# EAGLE board Qwiic-USB_Hub-Panel (EAGLE 9.6.2), part 1 of 2
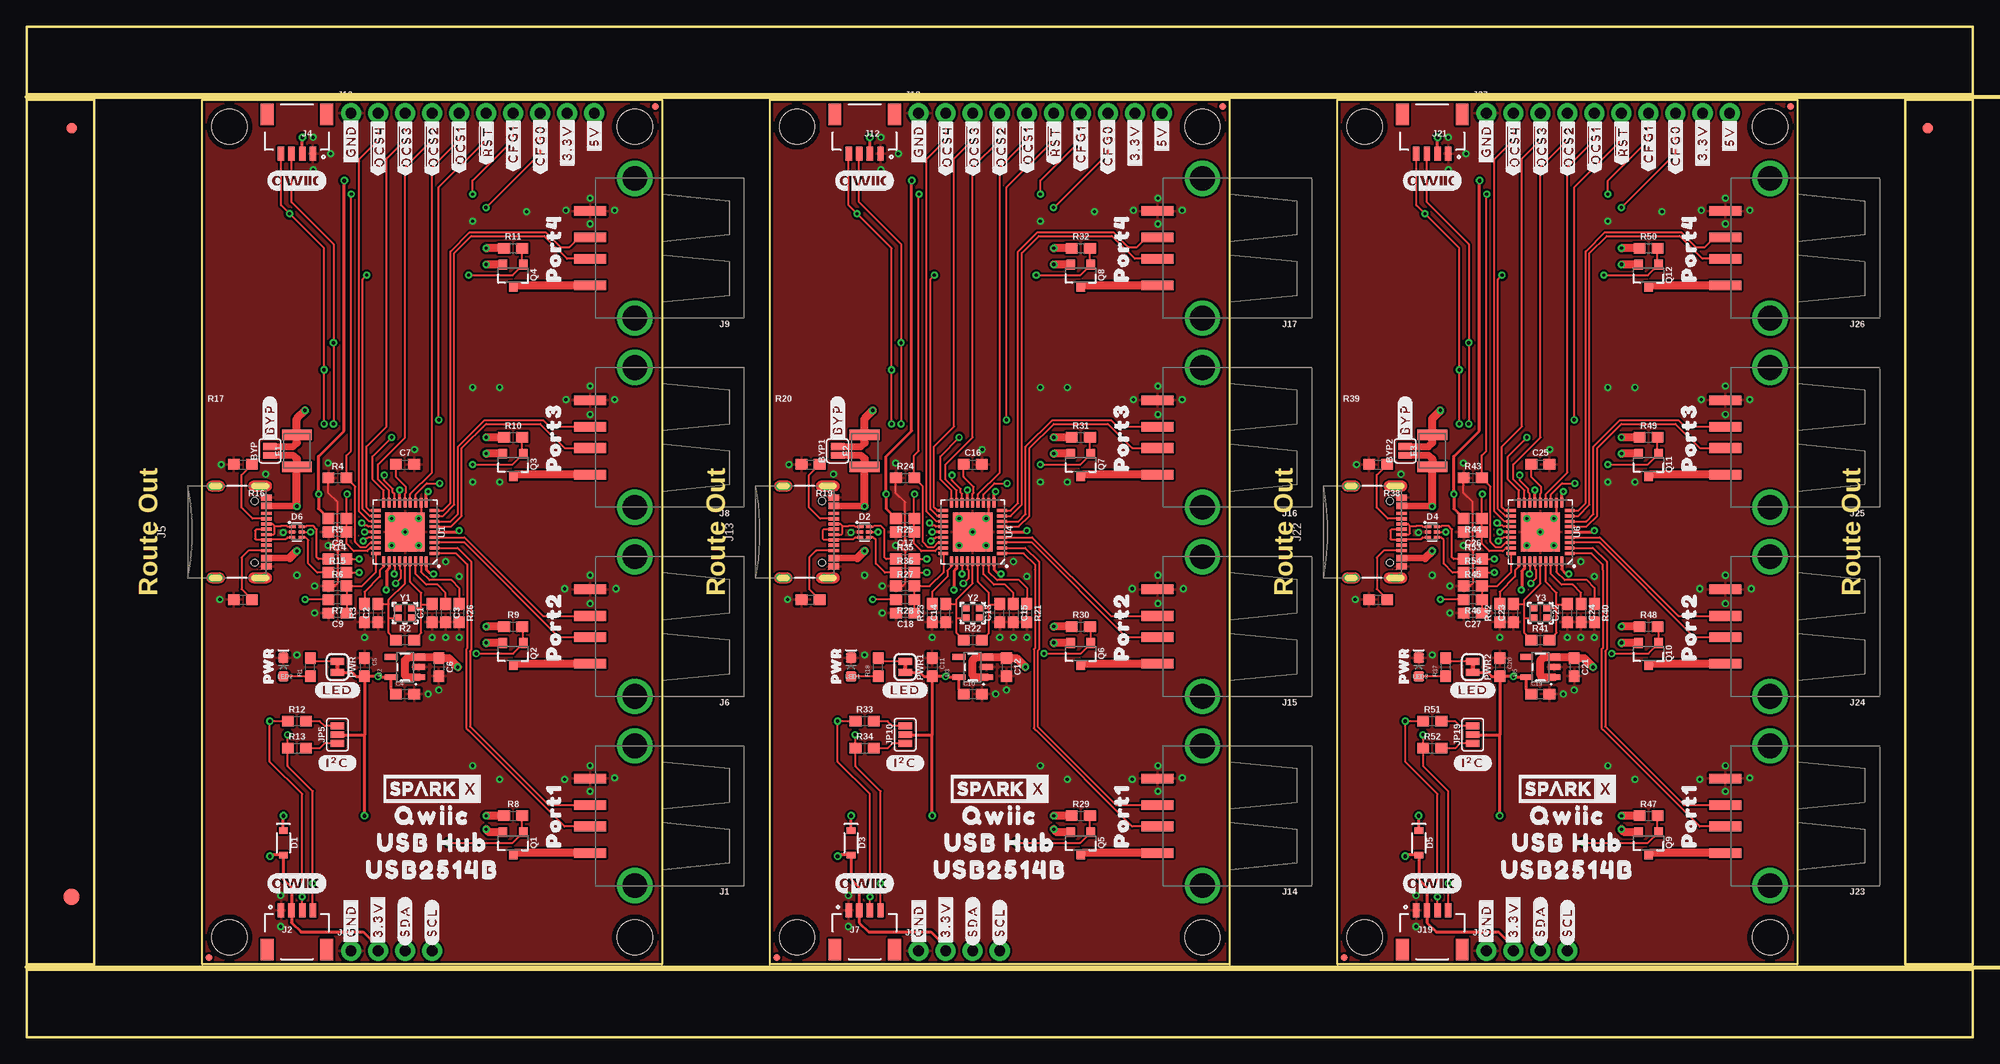
[diagram p0: board, top side]
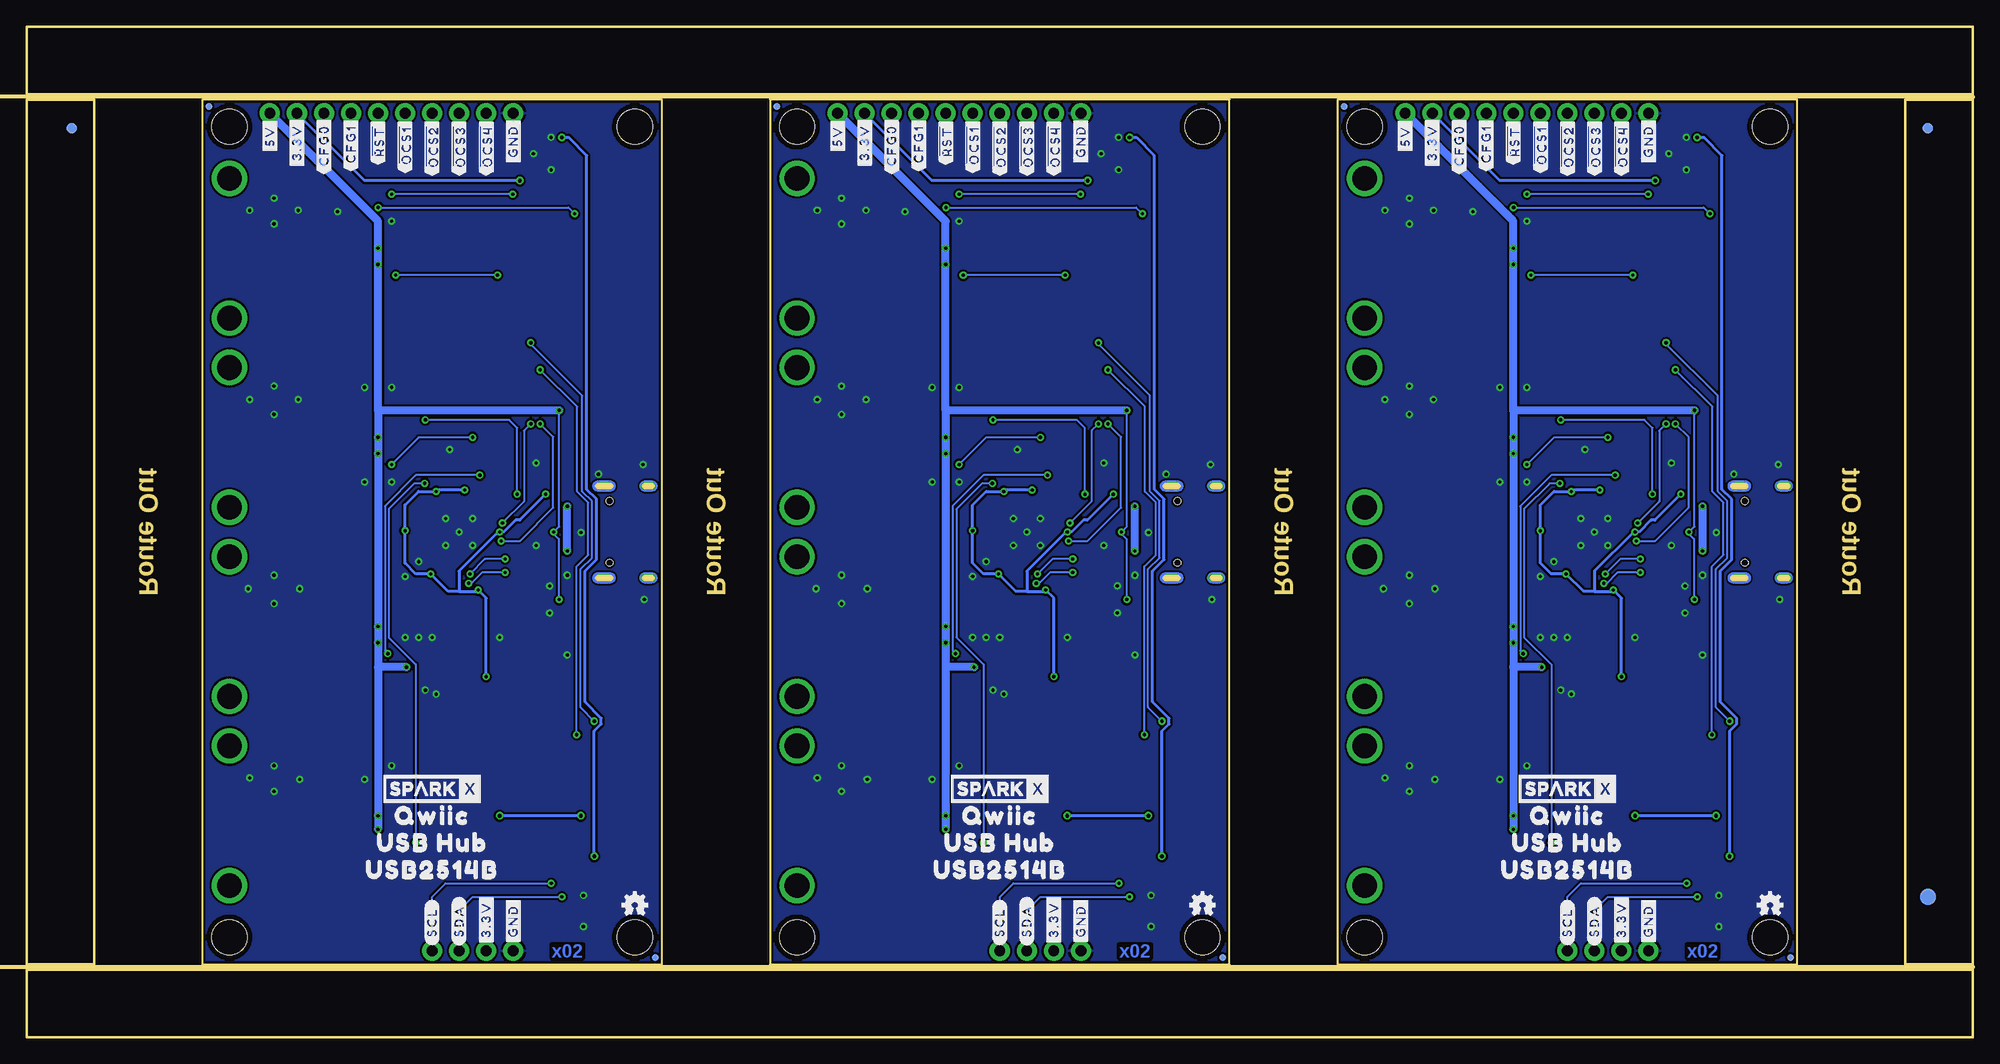
[diagram p1: board, bottom side, seen from below]

Size 182.88 x 95 mm. Coordinates in mm from the lower left corner, seen from the top.
Outline: 59.69,6.86 16.51,6.86 16.51,88.14 59.69,88.14 59.69,6.86
Outline: 113.03,6.86 69.85,6.86 69.85,88.14 113.03,88.14 113.03,6.86
Outline: 166.37,6.86 123.19,6.86 123.19,88.14 166.37,88.14 166.37,6.86
Outline: 0,6.35 182.88,6.35 182.88,0 0,0 0,6.35
Outline: 176.53,88.14 182.88,88.14 182.88,6.86 176.53,6.86 176.53,88.14
Outline: 0,95 182.88,95 182.88,88.65 0,88.65 0,95
Outline: 0,88.14 6.35,88.14 6.35,6.86 0,6.86 0,88.14
Copper layers (1*16): Top 0.035mm / dielectric 1.5mm / Bottom 0.035mm
Design rules "Qwiic-USB_Hub": minimum track width 7mil, minimum drill 0.3mm, track to track 7mil, track to pad 7mil, pad to pad 7mil, via to via 7mil, smd to smd 7mil, copper to edge 7mil, drill to drill 7mil, minimum pad ring 7mil, minimum via ring 7mil, stop-mask expansion 4mil, vias tented up to drill 25mil, thermal gap 10mil
Net classes: 2 3.3V: width 0.305 mm
Milling: 2 lines

## Footprints (pad centres in the part's own frame; a part is rotated, then mirrored left to right if it is on the bottom)
SMT-JUMPER_2_NO_SILK = smd 0.635 x 1.27: 1 -0.406,0; 2 0.406,0
0603 = smd 1.1 x 1: 1 -0.85,0; 2 0.85,0
SOD-323 = smd 0.63 x 0.83: A 1.15,0; C -1.15,0
SOT886 = smd 0.61 x 0.25: 1 -0.405,0.5 | smd 0.56 x 0.25: 2 -0.43,0; 3 -0.43,-0.5; 4 0.43,-0.5; 5 0.43,0; 6 0.43,0.5
FIDUCIAL-1X2 = smd 1 x 1: 1 0,0
FIDUCIAL-1.5X3 = smd 1.5 x 1.5: 1 0,0
1210 = smd 1 x 2.8: 1 -1.5,0; 2 1.5,0
USB-A-S-NOSILK-FEMALE = smd 3 x 0.9: D+ 6.752,-1; D- 6.752,1; GND 6.752,-3.5; VBUS 6.752,3.5 | drill 2.311: SHLD1 2.54,-6.566; SHLD2 2.54,6.566
JST04_1MM_RA = smd 0.6 x 1.35: 1 -1.5,0; 2 -0.5,0; 3 0.5,0; 4 1.5,0 | smd 1.2 x 2: NC1 2.8,-3.675; NC2 -2.8,-3.675
1X04_NO_SILK = drill 1.016 pad 1.88: 1 0,0; 2 2.54,0; 3 5.08,0; 4 7.62,0
USB-C-16P-2LAYER-PADS = smd 0.3 x 1: A5 -1.25,-0.34; A6 -0.25,-0.34; A7 0.25,-0.34; A8 1.25,-0.34; B5 1.75,-0.34; B6 0.75,-0.34; B7 -0.75,-0.34; B8 -1.75,-0.34 | smd 0.6 x 1: GND -3.225,-0.34; GND2 3.225,-0.34; VBUS1 -2.45,-0.34; VBUS2 2.45,-0.34 | drill 0.4 pad 0.6 long: SHLD1 -4.318,-0.915; SHLD2 4.318,-0.915; SHLD3 -4.318,-5.095; SHLD4 4.318,-5.095 | hole 0.65: -2.89,-1.445; 2.89,-1.445
1X10_NO_SILK = drill 1.016 pad 1.88: 1 0,0; 2 2.54,0; 3 5.08,0; 4 7.62,0; 5 10.16,0; 6 12.7,0; 7 15.24,0; 8 17.78,0; 9 20.32,0; 10 22.86,0
STAND-OFF = hole 3.302: 0,0
MICRO-FIDUCIAL = smd 0.635 x 0.635: 1 0,0
SMT-JUMPER_3_NO_SILK = smd 0.635 x 1.27: 1 -0.813,0; 2 0,0; 3 0.813,0
LED-0603 = smd 1 x 1: A -0.877,0; C 0.877,0
SMT-JUMPER_2_NC_TRACE_SILK = smd 0.66 x 1.27: 1 -0.521,0; 2 0.521,0
SOT23-3 = smd 0.8 x 0.9: 1 -0.95,-1; 2 0.95,-1; 3 0,1.1
QFN-36 = smd 0.9 x 0.28: 1 -2.75,2; 2 -2.75,1.5; 3 -2.75,1; 4 -2.75,0.5; 5 -2.75,0; 6 -2.75,-0.5; 7 -2.75,-1; 8 -2.75,-1.5; 9 -2.75,-2; 19 2.75,-2; 20 2.75,-1.5; 21 2.75,-1; 22 2.75,-0.5; 23 2.75,0; 24 2.75,0.5; 25 2.75,1; 26 2.75,1.5; 27 2.75,2 | smd 0.28 x 0.9: 10 -2,-2.75; 11 -1.5,-2.75; 12 -1,-2.75; 13 -0.5,-2.75; 14 0,-2.75; 15 0.5,-2.75; 16 1,-2.75; 17 1.5,-2.75; 18 2,-2.75; 28 2,2.75; 29 1.5,2.75; 30 1,2.75; 31 0.5,2.75; 32 0,2.75; 33 -0.5,2.75; 34 -1,2.75; 35 -1.5,2.75; 36 -2,2.75 | smd 3.7 x 3.7: EP 0,0
SOT23-5 = smd 0.55 x 1.2: 1 -0.95,-1.3; 2 0,-1.3; 3 0.95,-1.3; 4 0.95,1.3; 5 -0.95,1.3
CRYSTAL-SMD-2.0X1.6MM = smd 0.75 x 0.7: 1 -0.675,-0.5; 2 0.675,-0.5; 3 0.675,0.5; 4 -0.675,0.5

## Placement (x,y rotation side)
BYP  JUMPER-SMT_2_NO_SILK  [SMT-JUMPER_2_NO_SILK]  22.86,55.12 90 top
BYP1  JUMPER-SMT_2_NO_SILK  [SMT-JUMPER_2_NO_SILK]  76.2,55.12 90 top
BYP2  JUMPER-SMT_2_NO_SILK  [SMT-JUMPER_2_NO_SILK]  129.54,55.12 90 top
C1  18pF  [0603]  38.1,39.88 90 top
C2  18pF  [0603]  33.02,39.88 90 top
C3  0.1uF  [0603]  39.37,39.88 270 top
C4  1.0uF  [0603]  35.56,32.26 0 top
C5  0.1uF  [0603]  31.75,34.8 270 top
C6  1.0uF  [0603]  38.73,34.8 270 top
C7  0.1uF  [0603]  35.56,53.85 0 top
C8  0.1uF  [0603]  29.21,47.5 180 top
C9  0.1uF  [0603]  29.21,39.88 180 top
C10  1.0uF  [0603]  88.9,32.26 0 top
C11  0.1uF  [0603]  85.09,34.8 270 top
C12  1.0uF  [0603]  92.08,34.8 270 top
C13  18pF  [0603]  91.44,39.88 90 top
C14  18pF  [0603]  86.36,39.88 90 top
C15  0.1uF  [0603]  92.71,39.88 270 top
C16  0.1uF  [0603]  88.9,53.85 0 top
C17  0.1uF  [0603]  82.55,47.5 180 top
C18  0.1uF  [0603]  82.55,39.88 180 top
C19  1.0uF  [0603]  142.24,32.26 0 top
C20  0.1uF  [0603]  138.43,34.8 270 top
C21  1.0uF  [0603]  145.41,34.8 270 top
C22  18pF  [0603]  144.78,39.88 90 top
C23  18pF  [0603]  139.7,39.88 90 top
C24  0.1uF  [0603]  146.05,39.88 270 top
C25  0.1uF  [0603]  142.24,53.85 0 top
C26  0.1uF  [0603]  135.89,47.5 180 top
C27  0.1uF  [0603]  135.89,39.88 180 top
D1  3A/10V/280mV  [SOD-323]  24.13,18.29 270 top
D2  PRTR5V0U2F  [SOT886]  78.74,47.5 0 top
D3  3A/10V/280mV  [SOD-323]  77.47,18.29 270 top
D4  PRTR5V0U2F  [SOT886]  132.08,47.5 0 top
D5  3A/10V/280mV  [SOD-323]  130.81,18.29 270 top
D6  PRTR5V0U2F  [SOT886]  25.4,47.5 0 top
E$1  [FIDUCIAL-1X2]  4.23,85.47 0 top
E$2  [FIDUCIAL-1X2]  4.23,85.47 0 bottom
E$3  [FIDUCIAL-1X2]  178.65,85.47 0 top
E$4  [FIDUCIAL-1X2]  178.65,85.47 0 bottom
E$5  [FIDUCIAL-1.5X3]  4.23,13.21 0 top
E$6  [FIDUCIAL-1.5X3]  4.23,13.21 0 bottom
F1  6V/2A  [1210]  25.4,55.12 90 top
F2  6V/2A  [1210]  78.74,55.12 90 top
F3  6V/2A  [1210]  132.08,55.12 90 top
J1  USB_A_FEMALE  [USB-A-S-NOSILK-FEMALE]  59.69,20.83 180 top
J2  Qwiic Right Angle  [JST04_1MM_RA]  25.4,11.94 0 top
J3  PTH  [1X04_NO_SILK]  30.48,8.13 0 top
J4  Qwiic Right Angle  [JST04_1MM_RA]  25.4,83.06 180 top
J5  [USB-C-16P-2LAYER-PADS]  22.86,47.5 270 top
J6  USB_A_FEMALE  [USB-A-S-NOSILK-FEMALE]  59.69,38.61 180 top
J7  Qwiic Right Angle  [JST04_1MM_RA]  78.74,11.94 0 top
J8  USB_A_FEMALE  [USB-A-S-NOSILK-FEMALE]  59.69,56.39 180 top
J9  USB_A_FEMALE  [USB-A-S-NOSILK-FEMALE]  59.69,74.17 180 top
J10  [1X10_NO_SILK]  30.48,86.87 0 top
J11  PTH  [1X04_NO_SILK]  83.82,8.13 0 top
J12  Qwiic Right Angle  [JST04_1MM_RA]  78.74,83.06 180 top
J13  [USB-C-16P-2LAYER-PADS]  76.2,47.5 270 top
J14  USB_A_FEMALE  [USB-A-S-NOSILK-FEMALE]  113.03,20.83 180 top
J15  USB_A_FEMALE  [USB-A-S-NOSILK-FEMALE]  113.03,38.61 180 top
J16  USB_A_FEMALE  [USB-A-S-NOSILK-FEMALE]  113.03,56.39 180 top
J17  USB_A_FEMALE  [USB-A-S-NOSILK-FEMALE]  113.03,74.17 180 top
J18  [1X10_NO_SILK]  83.82,86.87 0 top
J19  Qwiic Right Angle  [JST04_1MM_RA]  132.08,11.94 0 top
J20  PTH  [1X04_NO_SILK]  137.16,8.13 0 top
J21  Qwiic Right Angle  [JST04_1MM_RA]  132.08,83.06 180 top
J22  [USB-C-16P-2LAYER-PADS]  129.54,47.5 270 top
J23  USB_A_FEMALE  [USB-A-S-NOSILK-FEMALE]  166.37,20.83 180 top
J24  USB_A_FEMALE  [USB-A-S-NOSILK-FEMALE]  166.37,38.61 180 top
J25  USB_A_FEMALE  [USB-A-S-NOSILK-FEMALE]  166.37,56.39 180 top
J26  USB_A_FEMALE  [USB-A-S-NOSILK-FEMALE]  166.37,74.17 180 top
J27  [1X10_NO_SILK]  137.16,86.87 0 top
JP1  STAND-OFF  [STAND-OFF]  72.39,9.4 90 top
JP2  STAND-OFF  [STAND-OFF]  72.39,85.6 90 top
JP3  FIDUCIALUFIDUCIAL  [MICRO-FIDUCIAL]  112.4,87.5 90 top
JP4  FIDUCIALUFIDUCIAL  [MICRO-FIDUCIAL]  70.48,7.49 90 top
JP5  [SMT-JUMPER_3_NO_SILK]  29.21,28.45 90 top
JP6  FIDUCIALUFIDUCIAL  [MICRO-FIDUCIAL]  112.4,87.5 270 bottom
JP7  FIDUCIALUFIDUCIAL  [MICRO-FIDUCIAL]  70.48,7.49 270 bottom
JP8  STAND-OFF  [STAND-OFF]  110.49,9.4 90 top
JP9  STAND-OFF  [STAND-OFF]  110.49,85.6 90 top
JP10  [SMT-JUMPER_3_NO_SILK]  82.55,28.45 90 top
JP11  STAND-OFF  [STAND-OFF]  125.73,9.4 90 top
JP12  STAND-OFF  [STAND-OFF]  125.73,85.6 90 top
JP13  FIDUCIALUFIDUCIAL  [MICRO-FIDUCIAL]  165.73,87.5 90 top
JP14  FIDUCIALUFIDUCIAL  [MICRO-FIDUCIAL]  123.83,7.49 90 top
JP15  FIDUCIALUFIDUCIAL  [MICRO-FIDUCIAL]  165.73,87.5 270 bottom
JP16  FIDUCIALUFIDUCIAL  [MICRO-FIDUCIAL]  123.83,7.49 270 bottom
JP17  STAND-OFF  [STAND-OFF]  163.83,9.4 90 top
JP18  STAND-OFF  [STAND-OFF]  163.83,85.6 90 top
JP19  [SMT-JUMPER_3_NO_SILK]  135.89,28.45 90 top
JP21  FIDUCIALUFIDUCIAL  [MICRO-FIDUCIAL]  59.06,87.5 90 top
JP31  STAND-OFF  [STAND-OFF]  19.05,9.4 90 top
JP41  STAND-OFF  [STAND-OFF]  19.05,85.6 90 top
JP61  FIDUCIALUFIDUCIAL  [MICRO-FIDUCIAL]  17.15,7.49 90 top
JP71  FIDUCIALUFIDUCIAL  [MICRO-FIDUCIAL]  59.06,87.5 270 bottom
JP81  FIDUCIALUFIDUCIAL  [MICRO-FIDUCIAL]  17.15,7.49 270 bottom
JP91  STAND-OFF  [STAND-OFF]  57.15,9.4 90 top
JP101  STAND-OFF  [STAND-OFF]  57.15,85.6 90 top
LED1  RED  [LED-0603]  77.47,34.8 90 top
LED2  RED  [LED-0603]  24.13,34.8 90 top
LED3  RED  [LED-0603]  130.81,34.8 90 top
LOGO1  OSHW-LOGOMINI  [OSHW-LOGO-MINI]  19.05,12.45 0 bottom
LOGO2  QWIIC_LOGO_CONNECTOR  [QWIIC_5.5MM]  25.4,80.52 0 top
LOGO3  OSHW-LOGOMINI  [OSHW-LOGO-MINI]  72.39,12.45 0 bottom
LOGO4  QWIIC_LOGO_CONNECTOR  [QWIIC_5.5MM]  78.74,80.52 0 top
LOGO5  OSHW-LOGOMINI  [OSHW-LOGO-MINI]  125.73,12.45 0 bottom
LOGO6  QWIIC_LOGO_CONNECTOR  [QWIIC_5.5MM]  132.08,80.52 0 top
PWR  [SMT-JUMPER_2_NC_TRACE_SILK]  29.21,34.8 270 top
PWR1  [SMT-JUMPER_2_NC_TRACE_SILK]  82.55,34.8 270 top
PWR2  [SMT-JUMPER_2_NC_TRACE_SILK]  135.89,34.8 270 top
Q1  4.3A/20V/54mΩ  [SOT23-3]  45.72,18.29 180 top
Q2  4.3A/20V/54mΩ  [SOT23-3]  45.72,36.07 180 top
Q3  4.3A/20V/54mΩ  [SOT23-3]  45.72,53.85 180 top
Q4  4.3A/20V/54mΩ  [SOT23-3]  45.72,71.63 180 top
Q5  4.3A/20V/54mΩ  [SOT23-3]  99.06,18.29 180 top
Q6  4.3A/20V/54mΩ  [SOT23-3]  99.06,36.07 180 top
Q7  4.3A/20V/54mΩ  [SOT23-3]  99.06,53.85 180 top
Q8  4.3A/20V/54mΩ  [SOT23-3]  99.06,71.63 180 top
Q9  4.3A/20V/54mΩ  [SOT23-3]  152.4,18.29 180 top
Q10  4.3A/20V/54mΩ  [SOT23-3]  152.4,36.07 180 top
Q11  4.3A/20V/54mΩ  [SOT23-3]  152.4,53.85 180 top
Q12  4.3A/20V/54mΩ  [SOT23-3]  152.4,71.63 180 top
R1  1k  [0603]  26.67,34.8 90 top
R2  1M  [0603]  35.56,37.34 0 top
R3  100k  [0603]  31.75,39.88 90 top
R4  100k  [0603]  29.21,52.58 0 top
R5  100k  [0603]  29.21,48.77 180 top
R6  100k  [0603]  29.21,42.42 0 top
R7  100k  [0603]  29.21,41.15 180 top
R8  100k  [0603]  45.72,20.83 0 top
R9  100k  [0603]  45.72,38.61 0 top
R10  100k  [0603]  45.72,56.39 0 top
R11  100k  [0603]  45.72,74.17 0 top
R12  2.2k  [0603]  25.4,29.72 0 top
R13  2.2k  [0603]  25.4,27.18 0 top
R14  22  [0603]  29.21,44.96 0 top
R15  22  [0603]  29.21,43.69 0 top
R16  5.1k  [0603]  20.32,41.15 0 top
R17  5.1k  [0603]  20.32,53.85 0 top
R18  1k  [0603]  80.01,34.8 90 top
R19  5.1k  [0603]  73.66,41.15 0 top
R20  5.1k  [0603]  73.66,53.85 0 top
R21  12k  [0603]  93.98,39.88 270 top
R22  1M  [0603]  88.9,37.34 0 top
R23  100k  [0603]  85.09,39.88 90 top
R24  100k  [0603]  82.55,52.58 0 top
R25  100k  [0603]  82.55,48.77 180 top
R26  12k  [0603]  40.64,39.88 270 top
R27  100k  [0603]  82.55,42.42 0 top
R28  100k  [0603]  82.55,41.15 180 top
R29  100k  [0603]  99.06,20.83 0 top
R30  100k  [0603]  99.06,38.61 0 top
R31  100k  [0603]  99.06,56.39 0 top
R32  100k  [0603]  99.06,74.17 0 top
R33  2.2k  [0603]  78.74,29.72 0 top
R34  2.2k  [0603]  78.74,27.18 0 top
R35  22  [0603]  82.55,44.96 0 top
R36  22  [0603]  82.55,43.69 0 top
R37  1k  [0603]  133.35,34.8 90 top
R38  5.1k  [0603]  127,41.15 0 top
R39  5.1k  [0603]  127,53.85 0 top
R40  12k  [0603]  147.32,39.88 270 top
R41  1M  [0603]  142.24,37.34 0 top
R42  100k  [0603]  138.43,39.88 90 top
R43  100k  [0603]  135.89,52.58 0 top
R44  100k  [0603]  135.89,48.77 180 top
R45  100k  [0603]  135.89,42.42 0 top
R46  100k  [0603]  135.89,41.15 180 top
R47  100k  [0603]  152.4,20.83 0 top
R48  100k  [0603]  152.4,38.61 0 top
R49  100k  [0603]  152.4,56.39 0 top
R50  100k  [0603]  152.4,74.17 0 top
R51  2.2k  [0603]  132.08,29.72 0 top
R52  2.2k  [0603]  132.08,27.18 0 top
R53  22  [0603]  135.89,44.96 0 top
R54  22  [0603]  135.89,43.69 0 top
U1  USB251XB  [QFN-36]  35.56,47.5 180 top
U2  3.3V  [SOT23-5]  35.56,34.8 90 top
U3  3.3V  [SOT23-5]  88.9,34.8 90 top
U4  USB251XB  [QFN-36]  88.9,47.5 180 top
U5  3.3V  [SOT23-5]  142.24,34.8 90 top
U6  USB251XB  [QFN-36]  142.24,47.5 180 top
U$1  [PORT40]  49.53,74.17 90 top
U$2  [PORT31]  49.53,56.39 90 top
U$3  [PORT22]  49.53,38.61 90 top
U$4  [PORT13]  49.53,20.83 90 top
U$5  SPARKX-LOGO4  [SPARKX-MEDIUM]  38.1,23.37 0 top
U$6  [#3#3V#0]  33.02,11.05 90 bottom
U$7  [#SDA#0]  35.56,10.92 90 bottom
U$8  [#SCL#0]  38.1,10.79 90 bottom
U$9  [#GND#0]  30.48,10.92 90 bottom
U$10  [#I�C#1]  29.21,25.78 0 top
U$11  [#GND#5]  30.48,84.2 90 bottom
U$12  [PWR0]  22.73,34.92 90 top
U$13  [##RST##4]  43.18,84.2 90 top
U$14  [#3#3V#6]  50.8,84.07 90 top
U$15  [#5V#7]  53.34,84.71 90 top
U$16  [#GND#5]  30.48,84.2 90 top
U$17  [##OCS1##3]  40.64,83.82 90 top
U$18  [##OCS2##2]  38.1,83.69 90 top
U$19  [##OCS3##1]  35.56,83.69 90 top
U$20  [##OCS4##0]  33.02,83.69 90 top
U$21  [#BYP#0]  22.86,58.04 90 top
U$22  [QWIIC2]  38.1,20.83 0 top
U$23  [#LED#0]  29.21,32.64 0 top
U$24  [#CFG0#1]  48.26,83.82 90 top
U$25  [#CFG1#0]  45.72,83.95 90 top
U$26  [USB2514B0]  38.1,15.75 0 top
U$27  [USB_HUB1]  38.1,18.29 0 top
U$28  [#CFG1#0]  45.72,83.95 90 bottom
U$29  [#CFG0#1]  48.26,83.82 90 bottom
U$30  [##OCS1##3]  40.64,83.82 90 bottom
U$31  [##RST##4]  43.18,84.2 90 bottom
U$32  [#3#3V#6]  50.8,84.07 90 bottom
U$33  [#GND#0]  30.48,10.92 90 top
U$34  [#3#3V#0]  33.02,11.05 90 top
U$35  [#SDA#0]  35.56,10.92 90 top
U$36  [#SCL#0]  38.1,10.79 90 top
U$37  [#5V#7]  53.34,84.71 90 bottom
U$38  SPARKX-LOGO4  [SPARKX-MEDIUM]  38.1,23.37 0 bottom
U$39  [QWIIC2]  38.1,20.83 0 bottom
U$40  [USB_HUB1]  38.1,18.29 0 bottom
U$41  [USB2514B0]  38.1,15.75 0 bottom
U$42  [QWIIC_5.5MM]  25.4,14.48 0 top
U$43  [##OCS2##2]  38.1,83.69 90 bottom
U$44  [##OCS3##1]  35.56,83.69 90 bottom
U$45  [##OCS4##0]  33.02,83.69 90 bottom
U$46  [PORT40]  102.87,74.17 90 top
U$47  [PORT31]  102.87,56.39 90 top
U$48  [PORT22]  102.87,38.61 90 top
U$49  [PORT13]  102.87,20.83 90 top
U$50  SPARKX-LOGO4  [SPARKX-MEDIUM]  91.44,23.37 0 top
U$51  [#3#3V#0]  86.36,11.05 90 top
U$52  [#SDA#0]  88.9,10.92 90 top
U$53  [#SCL#0]  91.44,10.79 90 top
U$54  [#3#3V#0]  86.36,11.05 90 bottom
U$55  [#SDA#0]  88.9,10.92 90 bottom
U$56  [#SCL#0]  91.44,10.79 90 bottom
U$57  [#GND#0]  83.82,10.92 90 top
U$58  [#GND#0]  83.82,10.92 90 bottom
U$59  [#I�C#1]  82.55,25.78 0 top
U$60  [PWR0]  76.07,34.92 90 top
U$61  [##RST##4]  96.52,84.2 90 top
U$62  [#3#3V#6]  104.14,84.07 90 top
U$63  [#5V#7]  106.68,84.71 90 top
U$64  [#GND#5]  83.82,84.2 90 top
U$65  [#BYP#0]  76.2,58.04 90 top
U$66  [USB2514B0]  91.44,15.75 0 top
U$67  [QWIIC2]  91.44,20.83 0 top
U$68  [USB_HUB1]  91.44,18.29 0 top
U$69  [#LED#0]  82.55,32.64 0 top
U$70  [#GND#5]  83.82,84.2 90 bottom
U$71  [##RST##4]  96.52,84.2 90 bottom
U$72  [#3#3V#6]  104.14,84.07 90 bottom
U$73  [#5V#7]  106.68,84.71 90 bottom
U$74  SPARKX-LOGO4  [SPARKX-MEDIUM]  91.44,23.37 0 bottom
U$75  [QWIIC2]  91.44,20.83 0 bottom
U$76  [USB_HUB1]  91.44,18.29 0 bottom
U$77  [USB2514B0]  91.44,15.75 0 bottom
U$78  [QWIIC_5.5MM]  78.74,14.48 0 top
U$79  [##OCS1##3]  93.98,83.82 90 top
U$80  [##OCS2##2]  91.44,83.69 90 top
U$81  [##OCS3##1]  88.9,83.69 90 top
U$82  [##OCS4##0]  86.36,83.69 90 top
U$83  [#CFG0#1]  101.6,83.82 90 top
U$84  [#CFG1#0]  99.06,83.95 90 top
U$85  [#CFG1#0]  99.06,83.95 90 bottom
U$86  [#CFG0#1]  101.6,83.82 90 bottom
U$87  [##OCS1##3]  93.98,83.82 90 bottom
U$88  [##OCS2##2]  91.44,83.69 90 bottom
U$89  [##OCS3##1]  88.9,83.69 90 bottom
U$90  [##OCS4##0]  86.36,83.69 90 bottom
U$91  [PORT40]  156.21,74.17 90 top
U$92  [PORT31]  156.21,56.39 90 top
U$93  [PORT22]  156.21,38.61 90 top
U$94  [PORT13]  156.21,20.83 90 top
U$95  SPARKX-LOGO4  [SPARKX-MEDIUM]  144.78,23.37 0 top
U$96  [#3#3V#0]  139.7,11.05 90 top
U$97  [#SDA#0]  142.24,10.92 90 top
U$98  [#SCL#0]  144.78,10.79 90 top
U$99  [#3#3V#0]  139.7,11.05 90 bottom
U$100  [#SDA#0]  142.24,10.92 90 bottom
U$101  [#SCL#0]  144.78,10.79 90 bottom
U$102  [#GND#0]  137.16,10.92 90 top
U$103  [#GND#0]  137.16,10.92 90 bottom
U$104  [#I�C#1]  135.89,25.78 0 top
U$105  [PWR0]  129.41,34.92 90 top
U$106  [##RST##4]  149.86,84.2 90 top
U$107  [#3#3V#6]  157.48,84.07 90 top
U$108  [#5V#7]  160.02,84.71 90 top
U$109  [#GND#5]  137.16,84.2 90 top
U$110  [#BYP#0]  129.54,58.04 90 top
U$111  [USB2514B0]  144.78,15.75 0 top
U$112  [QWIIC2]  144.78,20.83 0 top
U$113  [USB_HUB1]  144.78,18.29 0 top
U$114  [#LED#0]  135.89,32.64 0 top
U$115  [#GND#5]  137.16,84.2 90 bottom
U$116  [##RST##4]  149.86,84.2 90 bottom
U$117  [#3#3V#6]  157.48,84.07 90 bottom
U$118  [#5V#7]  160.02,84.71 90 bottom
U$119  SPARKX-LOGO4  [SPARKX-MEDIUM]  144.78,23.37 0 bottom
U$120  [QWIIC2]  144.78,20.83 0 bottom
U$121  [USB_HUB1]  144.78,18.29 0 bottom
U$122  [USB2514B0]  144.78,15.75 0 bottom
U$123  [QWIIC_5.5MM]  132.08,14.48 0 top
U$124  [##OCS1##3]  147.32,83.82 90 top
U$125  [##OCS2##2]  144.78,83.69 90 top
U$126  [##OCS3##1]  142.24,83.69 90 top
U$127  [##OCS4##0]  139.7,83.69 90 top
U$128  [#CFG0#1]  154.94,83.82 90 top
U$129  [#CFG1#0]  152.4,83.95 90 top
U$130  [#CFG1#0]  152.4,83.95 90 bottom
U$131  [#CFG0#1]  154.94,83.82 90 bottom
U$132  [##OCS1##3]  147.32,83.82 90 bottom
U$133  [##OCS2##2]  144.78,83.69 90 bottom
U$134  [##OCS3##1]  142.24,83.69 90 bottom
U$135  [##OCS4##0]  139.7,83.69 90 bottom
Y1  24MHz  [CRYSTAL-SMD-2.0X1.6MM]  35.56,39.88 0 top
Y2  24MHz  [CRYSTAL-SMD-2.0X1.6MM]  88.9,39.88 0 top
Y3  24MHz  [CRYSTAL-SMD-2.0X1.6MM]  142.24,39.88 0 top

## Library data of the parts
BYP BYP1 BYP2 JP5 JP10 JP19 PWR PWR1 PWR2 = SparkFun-Jumpers
C1 C2 C13 C14 C22 C23 = SparkFun-Capacitors; PROD_ID: CAP-08267
C3 C5 C7-C9 C11 C15-C18 C20 C24-C27 = SparkFun-Capacitors; PROD_ID: CAP-08604
C4 C6 C10 C12 C19 C21 = SparkFun-Capacitors; PROD_ID: CAP-13930
D1 D3 D5 = SparkFun-DiscreteSemi; PROD_ID: DIO-14072
D2 D4 D6 = SparkFun-IC-Power; PROD_ID: DIO-14084
E$1-E$4 LOGO1-LOGO6 U$42 U$78 U$123 = SparkFun-Aesthetics
E$5 E$6 = SparkFun-Retired
F1-F3 = SparkFun-Fuses; PROD_ID: RES-14313
J1 J6 J8 J9 J14-J17 J23-J26 = SparkFun-Connectors; PROD_ID: CONN-09520; SF_ID: PRT-09011
J2 J4 J7 J12 J19 J21 = SparkFun-Connectors; PROD_ID: CONN-13694
J3 J11 J20 U$5 U$38 U$50 U$74 U$95 U$119 = SparkX
J5 J13 J22 = SparkFun-Connectors; PROD_ID: CONN-14122
J10 J18 J27 = SparkFun-Connectors
JP1-JP4 JP6-JP9 JP11-JP18 JP21 JP31 JP41 JP61 JP71 JP81 JP91 JP101 = SparkFun
LED1-LED3 = SparkFun-LED; PROD_ID: DIO-00819
Q1-Q12 = SparkFun-DiscreteSemi; PROD_ID: TRANS-11153
R1 R18 R37 = SparkFun-Resistors; PROD_ID: RES-07856
R2 R22 R41 = SparkFun-Resistors; PROD_ID: RES-07868
R3-R11 R23-R25 R27-R32 R42-R50 = SparkFun-Resistors; PROD_ID: RES-07828
R12 R13 R33 R34 R51 R52 = SparkFun-Resistors; PROD_ID: RES-08272
R14 R15 R35 R36 R53 R54 = SparkFun-Resistors; PROD_ID: RES-08698
R16 R17 R19 R20 R38 R39 = SparkFun-Resistors; PROD_ID: RES-12083
R21 R26 R40 = SparkFun-Resistors; PROD_ID: RES-10327
U1 U4 U6 = USB251xB; PROD_ID: IC-15827
U2 U3 U5 = SparkFun-IC-Power; PROD_ID: VREG-12457
U$1-U$4 U$6-U$37 U$39-U$41 U$43-U$49 U$51-U$73 U$75-U$77 U$79-U$94 U$96-U$118 U$120-U$122 U$124-U$135 = output
Y1-Y3 = SparkFun-Clocks; PROD_ID: XTAL-14845

## Nets
3.3V [3.3V]: C4.1 C5.2 D1.C J10.9 JP5.2 PWR.2 R5.2 U1.5 U1.10 U1.15 U1.23 U1.29 U1.36 U2.5
3.3V1 [3.3V]: C10.1 C11.2 D3.C J18.9 JP10.2 PWR1.2 R25.2 U3.5 U4.5 U4.10 U4.15 U4.23 U4.29 U4.36
3.3V2 [3.3V]: C19.1 C20.2 D5.C J27.9 JP19.2 PWR2.2 R44.2 U5.5 U6.5 U6.10 U6.15 U6.23 U6.29 U6.36
5V: BYP.2 C6.1 D6.5 F1.2 J10.10 Q1.2 Q2.2 Q3.2 Q4.2 R7.2 R8.1 R9.1 R10.1 R11.1 U2.1 U2.3
5V1: BYP1.2 C12.1 D2.5 F2.2 J18.10 Q5.2 Q6.2 Q7.2 Q8.2 R28.2 R29.1 R30.1 R31.1 R32.1 U3.1 U3.3
5V2: BYP2.2 C21.1 D4.5 F3.2 J27.10 Q9.2 Q10.2 Q11.2 Q12.2 R46.2 R47.1 R48.1 R49.1 R50.1 U5.1 U5.3
!OCS1: J10.5 U1.13
!OCS2: J10.4 U1.17
!OCS3: J10.3 U1.19
!OCS4: J10.2 U1.21
!OCS5: J18.5 U4.13
!OCS6: J18.4 U4.17
!OCS7: J18.3 U4.19
!OCS8: J18.2 U4.21
!OCS9: J27.5 U6.13
!OCS10: J27.4 U6.17
!OCS11: J27.3 U6.19
!OCS12: J27.2 U6.21
!RESET: C8.1 J10.6 R5.1 U1.26
!RESET1: C17.1 J18.6 R25.1 U4.26
!RESET2: C26.1 J27.6 R44.1 U6.26
CC1: J5.A5 R17.2
CC2: J5.B5 R16.2
CC3: J13.A5 R20.2
CC4: J13.B5 R19.2
CC5: J22.A5 R39.2
CC6: J22.B5 R38.2
CFG1: J10.7 R4.2 U1.25
CFG2: J18.7 R24.2 U4.25
CFG3: J27.7 R43.2 U6.25
D_N: D6.6 R14.1
D_N1: D2.6 R35.1
D_N2: D4.6 R53.1
D_P: D6.4 R15.1
D_P1: D2.4 R36.1
D_P2: D4.4 R54.1
GND: C1.1 C2.1 C3.2 C4.2 C5.1 C6.2 C7.2 C8.2 C9.2 D6.2 J1.GND J2.1 J3.1 J4.1 J5.GND J5.GND2 J5.SHLD1 J5.SHLD2 J5.SHLD3 J5.SHLD4 J6.GND J8.GND J9.GND J10.1 LED2.C R3.1 R4.1 R6.1 R16.1 R17.1 R26.2 U1.11 U1.EP U2.2
GND1: C10.2 C11.1 C12.2 C13.1 C14.1 C15.2 C16.2 C17.2 C18.2 D2.2 J7.1 J11.1 J12.1 J13.GND J13.GND2 J13.SHLD1 J13.SHLD2 J13.SHLD3 J13.SHLD4 J14.GND J15.GND J16.GND J17.GND J18.1 LED1.C R19.1 R20.1 R21.2 R23.1 R24.1 R27.1 U3.2 U4.11 U4.EP
GND2: C19.2 C20.1 C21.2 C22.1 C23.1 C24.2 C25.2 C26.2 C27.2 D4.2 J19.1 J20.1 J21.1 J22.GND J22.GND2 J22.SHLD1 J22.SHLD2 J22.SHLD3 J22.SHLD4 J23.GND J24.GND J25.GND J26.GND J27.1 LED3.C R38.1 R39.1 R40.2 R42.1 R43.1 R45.1 U5.2 U6.11 U6.EP
N$1: J1.VBUS Q1.3
N$2: J6.VBUS Q2.3
N$3: J8.VBUS Q3.3
N$4: J9.VBUS Q4.3
N$5: R26.1 U1.35
N$6: C1.2 R2.2 U1.33 Y1.3
N$7: BYP.1 F1.1 J5.VBUS1 J5.VBUS2
N$8: C2.2 R2.1 U1.32 Y1.1
N$9: JP5.1 R13.2
N$10: LED2.A R1.1
N$11: R3.2 U1.28
N$12: LED1.A R18.1
N$13: C3.1 U1.34
N$14: C7.1 U1.14
N$15: JP5.3 R12.2
N$16: R14.2 U1.30
N$17: PWR.1 R1.2
N$18: R15.2 U1.31
N$19: PWR1.1 R18.2
N$20: C13.2 R22.2 U4.33 Y2.3
N$21 [3.3V]: D1.A J2.2 J3.2 J4.2
N$22: C14.2 R22.1 U4.32 Y2.1
N$23: R21.1 U4.35
N$24: R23.2 U4.28
N$25: C15.1 U4.34
N$26: C16.1 U4.14
N$27: J14.VBUS Q5.3
N$28: J15.VBUS Q6.3
N$29: J16.VBUS Q7.3
N$30: J17.VBUS Q8.3
N$31: BYP1.1 F2.1 J13.VBUS1 J13.VBUS2
N$32: JP10.1 R34.2
N$33: JP10.3 R33.2
N$34: R35.2 U4.30
N$35: R36.2 U4.31
N$36 [3.3V]: D3.A J7.2 J11.2 J12.2
N$37: LED3.A R37.1
N$38: PWR2.1 R37.2
N$39: C22.2 R41.2 U6.33 Y3.3
N$40: C23.2 R41.1 U6.32 Y3.1
N$41: R40.1 U6.35
N$42: R42.2 U6.28
N$43: C24.1 U6.34
N$44: C25.1 U6.14
N$45: J23.VBUS Q9.3
N$46: J24.VBUS Q10.3
N$47: J25.VBUS Q11.3
N$48: J26.VBUS Q12.3
N$49: BYP2.1 F3.1 J22.VBUS1 J22.VBUS2
N$50: JP19.1 R52.2
N$51: JP19.3 R51.2
N$52: R53.2 U6.30
N$53: R54.2 U6.31
N$54 [3.3V]: D5.A J19.2 J20.2 J21.2
PORT1_N: J1.D- U1.1
PORT1_N1: J14.D- U4.1
PORT1_N2: J23.D- U6.1
PORT1_P: J1.D+ U1.2
PORT1_P1: J14.D+ U4.2
PORT1_P2: J23.D+ U6.2
PORT2_N: J6.D- U1.3
PORT2_N1: J15.D- U4.3
PORT2_N2: J24.D- U6.3
PORT2_P: J6.D+ U1.4
PORT2_P1: J15.D+ U4.4
PORT2_P2: J24.D+ U6.4
PORT3_N: J8.D- U1.6
PORT3_N1: J16.D- U4.6
PORT3_N2: J25.D- U6.6
PORT3_P: J8.D+ U1.7
PORT3_P1: J16.D+ U4.7
PORT3_P2: J25.D+ U6.7
PORT4_N: J9.D- U1.8
PORT4_N1: J17.D- U4.8
PORT4_N2: J26.D- U6.8
PORT4_P: J9.D+ U1.9
PORT4_P1: J17.D+ U4.9
PORT4_P2: J26.D+ U6.9
PRTPWR1: Q1.1 R8.2 U1.12
PRTPWR2: Q2.1 R9.2 U1.16
PRTPWR3: Q3.1 R10.2 U1.18
PRTPWR4: Q4.1 R11.2 U1.20
PRTPWR5: Q5.1 R29.2 U4.12
PRTPWR6: Q6.1 R30.2 U4.16
PRTPWR7: Q7.1 R31.2 U4.18
PRTPWR8: Q8.1 R32.2 U4.20
PRTPWR9: Q9.1 R47.2 U6.12
PRTPWR10: Q10.1 R48.2 U6.16
PRTPWR11: Q11.1 R49.2 U6.18
PRTPWR12: Q12.1 R50.2 U6.20
SCL/CFG0: J2.4 J3.4 J4.4 J10.8 R13.1 U1.24
SCL/CFG1: J7.4 J11.4 J12.4 J18.8 R34.1 U4.24
SCL/CFG2: J19.4 J20.4 J21.4 J27.8 R52.1 U6.24
SDA: J2.3 J3.3 J4.3 R12.1 U1.22
SDA1: J7.3 J11.3 J12.3 R33.1 U4.22
SDA2: J19.3 J20.3 J21.3 R51.1 U6.22
UNP_D+: D6.3 J5.A6 J5.B6
UNP_D+1: D2.3 J13.A6 J13.B6
UNP_D+2: D4.3 J22.A6 J22.B6
UNP_D-: D6.1 J5.A7 J5.B7
UNP_D-1: D2.1 J13.A7 J13.B7
UNP_D-2: D4.1 J22.A7 J22.B7
VBUS_DET: C9.1 R6.2 R7.1 U1.27
VBUS_DET1: C18.1 R27.2 R28.1 U4.27
VBUS_DET2: C27.1 R45.2 R46.1 U6.27